# Altium PCB GP1247AI.PCBDOC (part 2 of 2)
Units mm, origin at the board's own origin, x right, y up, seen from the top; angles counter-clockwise.
Board outline 170 x 60 mm, 4 copper layers (Top Layer, Layer 1, Layer 2, Bottom Layer), stack 1.548 mm thick; 78 components, 46 nets, 283 pads, 156 vias.
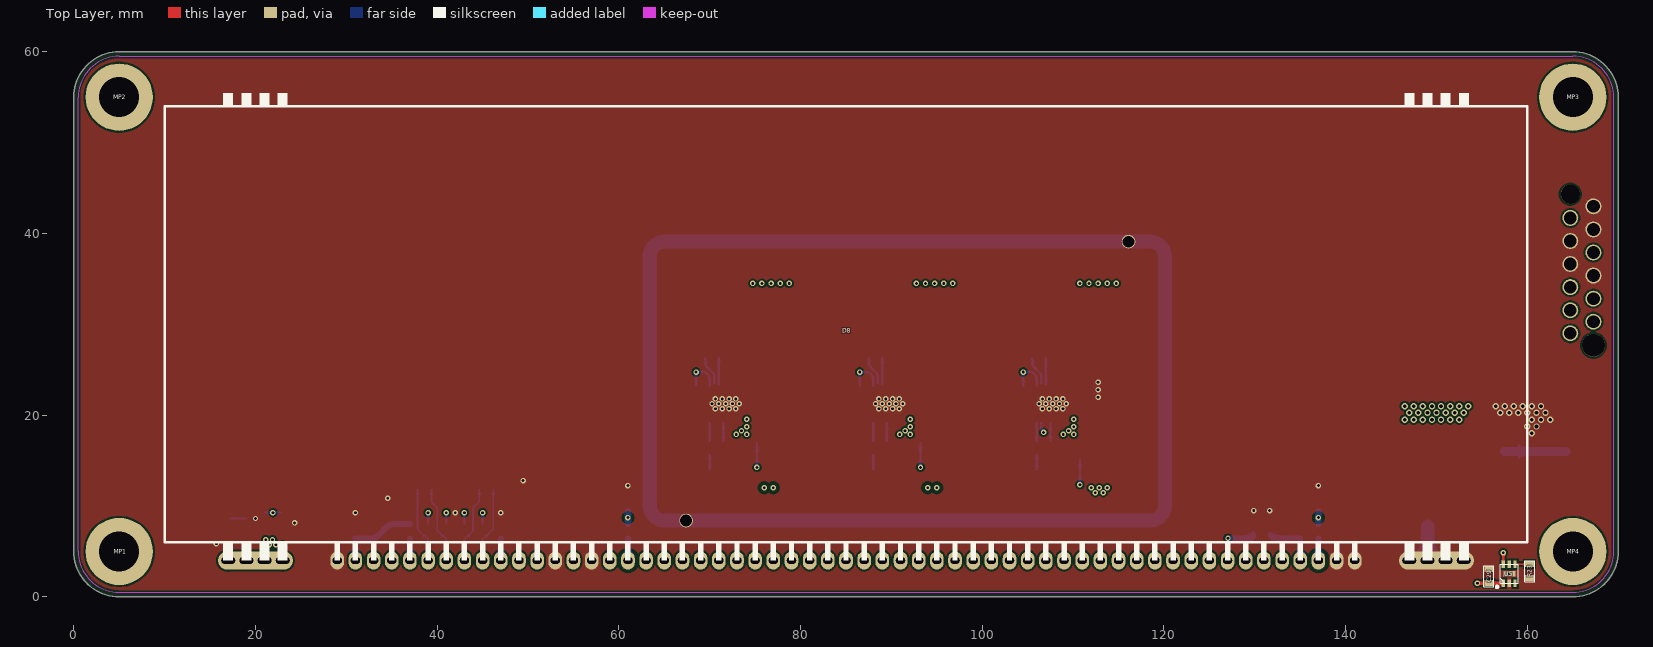
[diagram p0: Top Layer view]

## Polygon pours and split planes (outlines as drawn) (continued)
VIN on Bottom Layer "NONET_L-01_P-001" (solid, remove dead copper, pour order 86): 154,19 154,25.5 153.75,25.75 146.25,25.75 146,25.5 146,12.75 146.25,12.5 153.75,12.5 154,12.75
GND on Bottom Layer "NONET_L-01_P-001" (solid, remove dead copper, pour order 84): 167,17.25 167.25,17.5 167.25,18.5 167,18.75 164.5,18.75 161,22.25 161,25.5 160.75,25.75 157.5,25.75 156.25,25.75 156,25.5 156,19.511 159.5,19.511 159.5,17.25
NetL4_1 on Bottom Layer "NONET_L-01_P-001" (solid, remove dead copper, pour order 85): 167,16.75 167.25,16.5 167.25,15.5 167,15.25 164.5,15.25 161.75,12.5 156.25,12.5 156,12.75 156,16.75
VCC on Layer 1 "NONET_L-01_P-001" (solid, remove dead copper, pour order 85): 109.925,7.2 110.15,7.2 ccw(c110.15,8.55) 111.5,8.55 111.5,12 114.25,12 114.25,8.55 ccw(c115.6,8.55) 115.6,7.2 116,7.2 116,6.675 109.925,6.675
GND on Layer 1 "GND_L02_P090" (solid, remove dead copper, pour order 90): 0,0 0,60 170,60 170,0
VIN on Layer 1 "NONET_L-01_P-001" (solid, remove dead copper, pour order 89): 67,19 67,33 69,35 153,35 155,33 155,19 153,17 69,17
GND on Layer 2 "NONET_L-01_P-001" (solid, remove dead copper, pour order 87): 0,0 0,60 170,60 170,0

## Keep-outs
Bottom Layer:
  circle w0.25: c165,55 r3.75
  circle w0.25: c165.004,5 r3.75
  circle w0.25: c5,5 r3.75
  circle w0.25: c5,55 r3.75
  lines w0.1: 65.5,10.75 66,10.25 81.5,10.25 82,10.75 82,35.25 81.5,35.75 66,35.75 65.5,35.25 65.5,10.75 ; 83.5,10.75 84,10.25 99.5,10.25 100,10.75 100,35.25 99.5,35.75 84,35.75 83.5,35.25 83.5,10.75 ; 101.5,10.75 101.5,35.25 102,35.75 118,35.75 118.5,35.25 118.5,10.75 118,10.25 102,10.25 101.5,10.75
Keep-Out Layer:
  lines w0.1: 0.5,5 ccw(c5,5) 5,0.5 165,0.5 ccw(c165,5) 169.5,5 169.5,55 ccw(c165,55) 165,59.5 110.5,59.5 5,59.5 ccw(c5,55) 0.5,55 0.5,5

## Silkscreen, mask and mechanical layers (free items; w line width, h text height)
Bottom Solder:
  drawing of 34 lines, arcs and shapes, not listed
  text "GND" at 167.801,21.7 h1
  text "5-24V" at 168.792,11.25 h1
Mechanical 3:
  the board outline again, w0.1

## Text inside footprints (layer, text, board x,y; h text height)
D1: Bottom Overlay "K" at 95.103,19.616 h0.7 r90
D2: Bottom Overlay "K" at 77.103,19.616 h0.7 r90
D3: Bottom Overlay "K" at 112.901,19.147 h0.7
XS1: Bottom Overlay "1" at 165.3,19.15 h0.8 r90